# Altium PCB Reised_S_PCB.PcbDoc
Units mm, origin at the board's own origin, x right, y up, seen from the top; angles counter-clockwise.
Board outline 14 x 12 mm, 2 copper layers (Top Layer, Bottom Layer); 9 components, 6 nets, 32 pads, 11 vias.
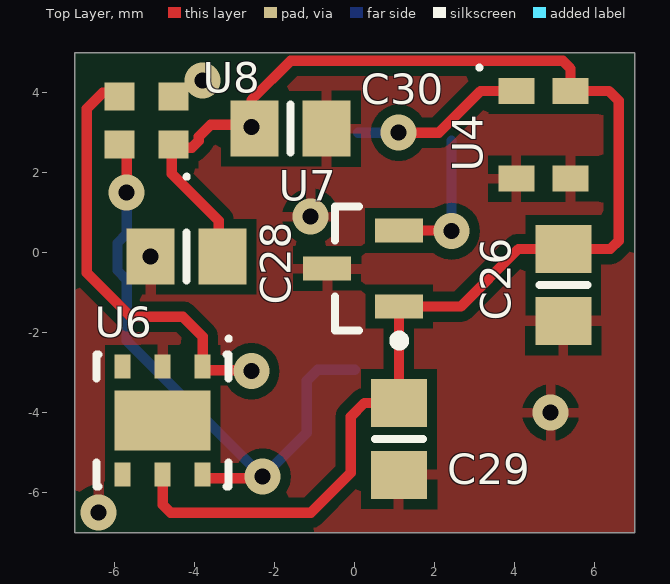
[diagram p0: Top Layer view]
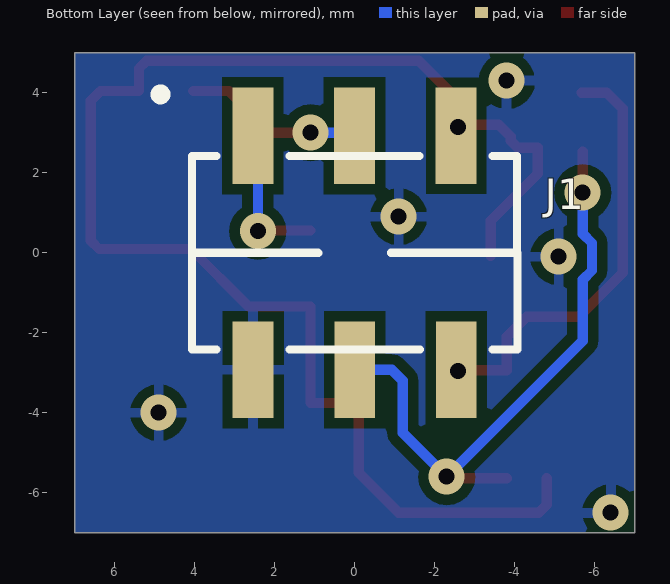
[diagram p1: Bottom Layer view, seen from below]

## Layer stack, top to bottom
Top Solder: solder mask 0.0102, Solder Resist, Dk 3.5
Top Layer: signal copper 0.0356
Dielectric 1: dielectric 0.32, FR-4, Dk 4.8
Bottom Layer: signal copper 0.0356
Bottom Solder: solder mask 0.0102, Solder Resist, Dk 3.5

## Board outline
-7,-7 -7,5 7,5 7,-7

## Design rules (kind name [scope] priority, off if disabled: settings)
Clearance [All] p1: gap=0.254
PolygonConnect [All] p1: connectstyle=Relief reliefconductorwidth=0.254 reliefentries=4 polygonreliefangle="90 Angle" airgapwidth=0.254
RoutingVias [All] p1: holewidth=0.711 width=1.27 viastyle="Through Hole" minholewidth=0.711 minwidth=1.27 maxholewidth=0.711 maxwidth=1.27
SolderMaskExpansion [All] p1: expansion=0.102
Width [All] p1: maxlimit=0.254 minlimit=0.254 preferedwidth=0.254
30 further rules are at their usual default settings.

## Components (designator, comment, footprint, x,y, rotation, side; value= is the part's Value field where it differs from the comment)
C26 "Cap" 6-0805_N 5.214,-0.809 r90 top
C28 "Cap" 6-0805_N -4.2,-0.1 r0 top
C29 "Cap" 6-0805_N 1.103,-4.655 r90 top
C30 "Cap" 6-0805_N -1.6,3.1 r180 top
J1 "SMTC-SSW-103-01-X-D" SMTC-SSW-103-22-X-S-VS 0.001,-1.211 r180 bottom
U4 "SPW2430HR5H" DFN3127P600-8N 4.717,2.946 r0 top
U6 "HTU20D" HTU20D_DFN6 -4.8,-4.2 r270 top
U7 "MCP9700AT-E/TT" SOT-23-TT3_L 0.213,-0.397 r180 top
U8 "LTR-329ALS" ChipLED4Pin2X2X07 -5.2,3.3 r180 top

## Footprints (in the part's own frame and the unit in brackets; to place one, negate y for a bottom-side part, rotate by r counter-clockwise, add the part's x,y. Pads: shape width x height; smd on the part's side, far side on the other; paste and mask are expansions set on the pad)
6-0805_N [mm] "Chip Resistor, Body 2.0x1.2mm, IPC Medium Density"
  rect 1.2x1.4 smd: 1(-0.9,0) 2(0.9,0)
  silkscreen extent 0,-0.6 0,0.6, body extent -1.07,-0.7 1.07,0.7, height 0.7
ChipLED4Pin2X2X07 [mm]
  rect 0.75x0.7 smd: 1(-0.675,0.6) 2(-0.675,-0.6) 3(0.675,-0.6) 4(0.675,0.6)
  silkscreen extent -1.05,1.35 -0.95,1.45, body extent -1,-1 1,1, height 0.7
DFN3127P600-8N [mm] "SPW2430HR5H MEMS Microphone"
  rect 0.9x0.65 smd: 1(-0.675,1.095) 2(-0.675,-1.095) 3(0.675,-1.095) 4(0.675,1.095)
  silkscreen extent -1.65,1.63 -1.55,1.73, body extent -1.25,-1.55 1.25,1.55, height 1
HTU20D_DFN6 [mm] "HTU20D, 6-Leads, Body 3.00x3.00mm, Pitch 1.00mm, Thermal Pad 2.40x1.50mm, IPC Medium Density"
  rect 0.6x0.4 smd: 1(-1.35,1) 2(-1.35,0) 3(-1.35,-1) 4(1.35,-1) 5(1.35,0) 6(1.35,1)
  rect 1.5x2.4 smd: 7(0,0)
  silkscreen extent -2.1,-1.65 1.65,1.7, body extent -1.5,-1.5 1.5,1.5, height 1
SMTC-SSW-103-22-X-S-VS [mm] "SQ Post Socket, 3 Pins, Vertical, 2.54mm Pitch, Female"
  rect 1.02x2.41 smd: 1(-2.54,-1.715) 2(-2.545,4.135) 3(0,-1.715) 4(-0.005,4.135) 5(2.54,-1.715) 6(2.535,4.135)
  silkscreen extent -4.98,-1.2 4.07,5.29, body extent -4.07,-2.58 4.06,5, height 9.78
SOT-23-TT3_L [mm] "SOT23, 3-Leads, Body 2.9x1.3mm, Pitch 0.95mm, Lead Span 2.4mm, IPC High Density"
  rect 1.2x0.6 smd: 1(-0.9,0.95) 2(-0.9,-0.95) 3(0.9,0)
  silkscreen extent -1.02,-1.55 0.7,1.92, body extent -0.7,-1.52 0.7,1.53, height 1.12

## Part data
C26 C28 C29 C30: "Capacitor"
U4: "Knowles MEMS Microphone"
U6: "Digital relative Humidity sensor with temperature output"
U7: library part CMP-0192-00218-1, "Low-Power Linear Active Thermistor IC, 3-Pin SOT-23, Extended Temperature, Tape and Reel"
U8: "Digital Ambient Light Sensor"

## Via types
v1: diameter 0.9, hole 0.4, Top Layer to Bottom Layer, 11 vias

## Nets (pads, with @x,y where several pads share a name; then routed paths per layer and width w, separated by ;. In a path a pad name is that pad's centre, name@x,y a point inside that pad or via, vN(x,y) a via of type N, cw(c..) or ccw(c..) an arc to the next point about the centre after c; other vN are vias at no path point)
GND: C26.1 C28.1 C29.1 C30.1 J1.1 U4.2 U4.3 U6.2 U7.3 U8.2
  other v1: -6.4,-6.5 4.9,-4 -5.1,-0.1 -1.1,0.9 -3.8,4.3
NetJ1_2: J1.2 U7.2 | length 3.6
  Top Layer w0.254: U7.2 v1@2.407,0.553
  Bottom Layer w0.254: v1(2.421,0.539) J1.2@2.421,2.799
NetJ1_3: J1.3 U6.6 U8.4 | length 15.8
  Top Layer w0.254: v1(-5.7,1.5) U8.4@-5.7,2.525 ; U6.6@-3.799,-5.638 -2.056,-5.638 -2.094,-5.6 v1(-2.3,-5.6)
  Bottom Layer w0.254: v1@-5.7,1.4 -5.7,0.475 -5.931,0.244 -5.931,-0.444 -5.7,-0.675 -5.7,-2.2 v1(-2.3,-5.6) -1.2,-4.5 -1.2,-3.2 -0.926,-2.926 J1.3
NetJ1_4: J1.4 U4.1 | length 4.4
  Top Layer w0.254: v1(1.1,3) 2.1,3 3.141,4.041 U4.1
  Bottom Layer w0.254: J1.4@0.081,3 v1(1.1,3)
NetJ1_5: J1.5 U6.1 U8.3 | length 10.9
  Top Layer w0.254: U8.3@-5.675,4 -6.3,4 -6.7,3.6 -6.7,-0.5 -5.6,-1.6 -4.3,-1.6 -3.799,-2.101 -3.799,-2.938 v1@-2.602,-2.938
  other v1: -2.579,-2.961
VCC: C26.2 C28.2 C29.2 C30.2 J1.6 U4.4 U6.5 U7.1 U8.1 | length 37
  Top Layer w0.254: U6.5@-4.799,-5.638 -4.799,-6.301 -4.6,-6.5 -1.1,-6.5 -0.1,-5.5 -0.1,-4.1 0.245,-3.755 C29.2 1.103,-1.357 U7.1 2.653,-1.347 4.091,0.091 C26.2 6.391,0.091 6.6,0.3 6.6,3.8 6.359,4.041 U4.4 5.392,4.608 5.2,4.8 -1.6,4.8 -2.579,3.821 v1(-2.579,3.139) ; C28.2@-3.4,-0.085 -3.4,0.8 -4.574,1.974 -4.574,2.626 -4.074,2.626 -3.9,2.8 -3.9,2.9 -3.6,3.2 C30.2@-2.8,3.2
pads on no net: U6.3 U6.4 U6.7

## Polygon pours and split planes (outlines as drawn)
GND on Top Layer "GND POLIGON" (solid, pour order 0): -7,-7 -7,5 7,5 7,-7 -7,-7
GND on Bottom Layer "GND POLIGON" (solid, pour order 2): -7,-7 -7,5 7,5 7,-7 -7,-7

## Silkscreen, mask and mechanical layers (free items; w line width, h text height)
Mechanical 15:
  the board outline again, w0.254